# EAGLE board proto (EAGLE 4.13)
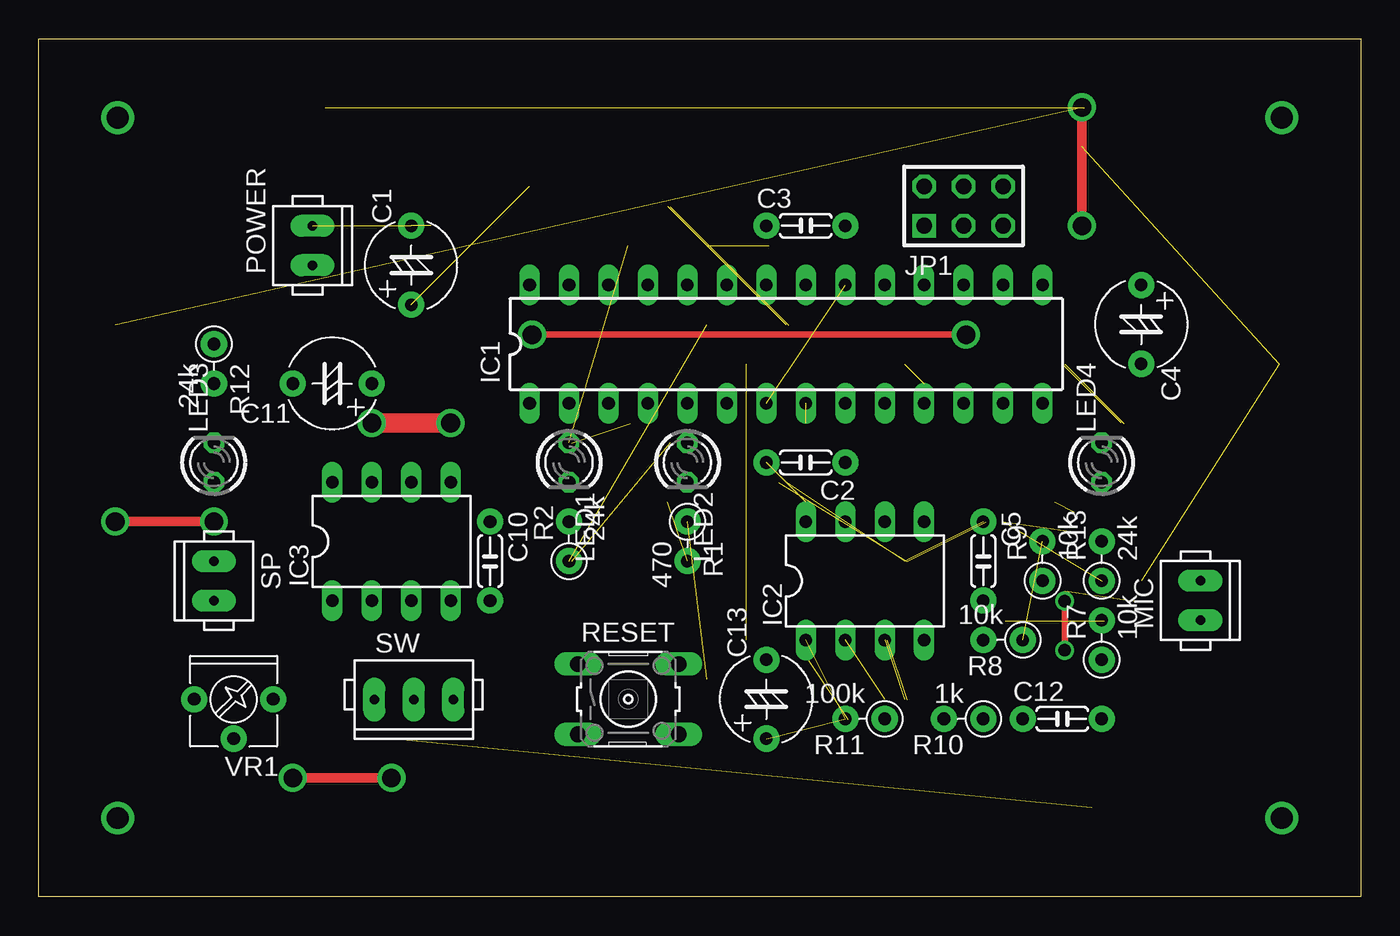
[diagram p0: board, top side]
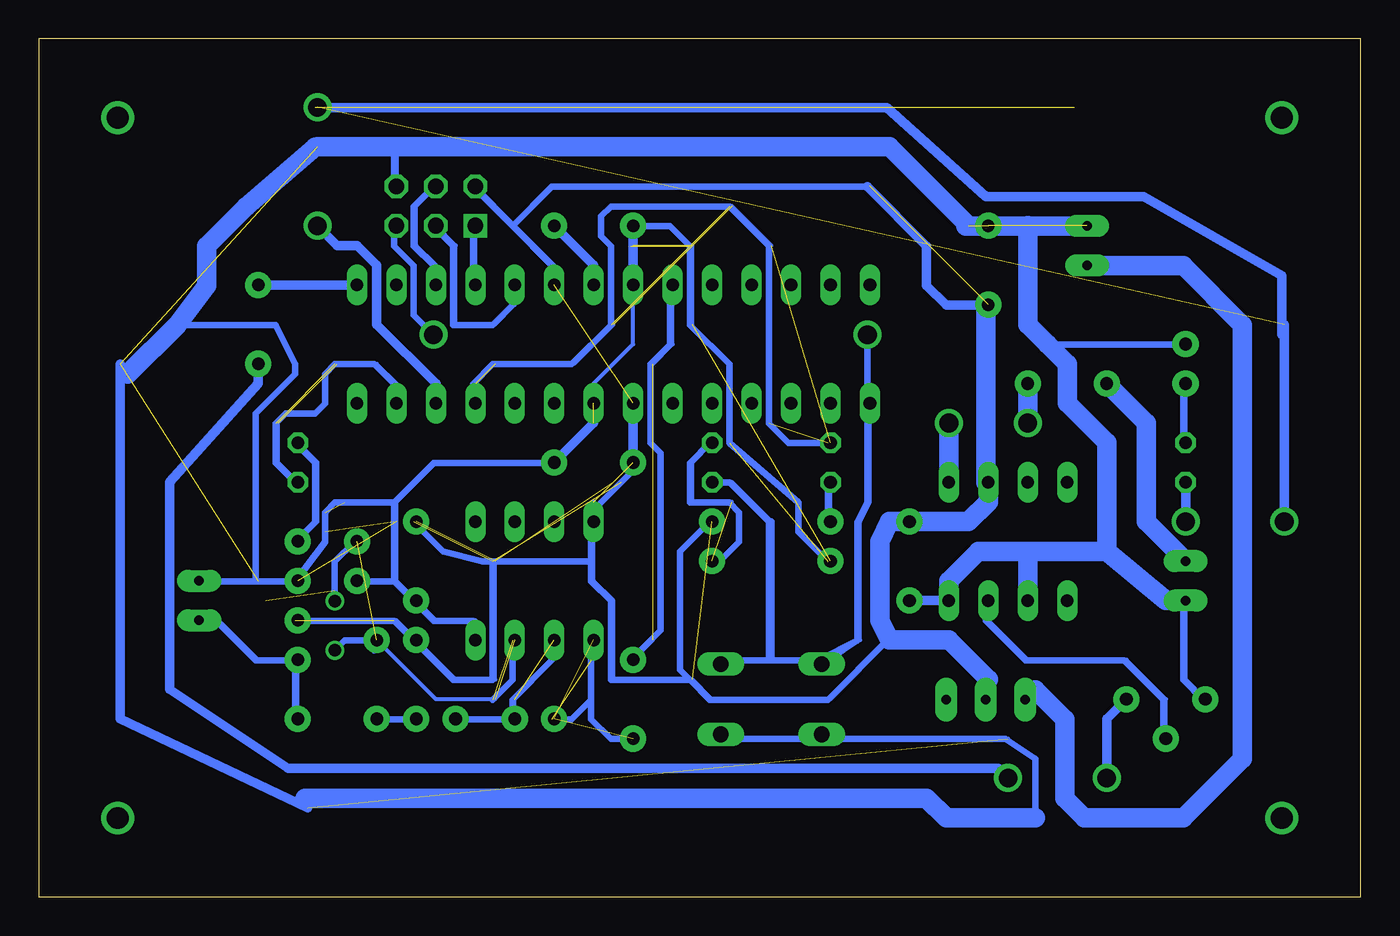
[diagram p1: board, bottom side, seen from below]

Size 85.09 x 55.24 mm. Coordinates in mm from the lower left corner, seen from the top.
Outline: 0,0 0,55.24 85.09,55.24 85.09,0 0,0
Copper layers (1*16): Top 0.035mm / dielectric 1.5mm / Bottom 0.035mm
Design rules "default": minimum track width 10mil, minimum drill 24mil, track to track 8mil, track to pad 8mil, pad to pad 8mil, via to via 8mil, smd to smd 8mil, copper to edge 40mil, drill to drill 8mil, minimum pad ring 10mil, minimum via ring 8mil, stop-mask expansion 4mil, vias tented up to drill 0mil, thermal gap 10mil

## Footprints (pad centres in the part's own frame; a part is rotated, then mirrored left to right if it is on the bottom)
E3,5-8 = drill 0.813 pad 1.676 round: 1 -2.54,0; 2 2.54,0
C5B3 = drill 0.813 pad 1.676 round: 1 -2.54,0; 2 2.54,0
DIL28-3 = drill 0.813 long: 1 -16.51,-3.81; 2 -13.97,-3.81; 3 -11.43,-3.81; 4 -8.89,-3.81; 5 -6.35,-3.81; 6 -3.81,-3.81; 7 -1.27,-3.81; 8 1.27,-3.81; 9 3.81,-3.81; 10 6.35,-3.81; 11 8.89,-3.81; 12 11.43,-3.81; 13 13.97,-3.81; 14 16.51,-3.81; 15 16.51,3.81; 16 13.97,3.81; 17 11.43,3.81; 18 8.89,3.81; 19 6.35,3.81; 20 3.81,3.81; 21 1.27,3.81; 22 -1.27,3.81; 23 -3.81,3.81; 24 -6.35,3.81; 25 -8.89,3.81; 26 -11.43,3.81; 27 -13.97,3.81; 28 -16.51,3.81
DIL08 = drill 0.813 long: 1 -3.81,-3.81; 2 -1.27,-3.81; 3 1.27,-3.81; 4 3.81,-3.81; 5 3.81,3.81; 6 1.27,3.81; 7 -1.27,3.81; 8 -3.81,3.81
AVR-ISP-6 = drill 1.016 square: 1 -2.54,-1.27 | drill 1.016 octagon: 2 -2.54,1.27; 3 0,-1.27; 4 0,1.27; 5 2.54,-1.27; 6 2.54,1.27
LED3MM = drill 0.813 octagon: A -1.27,0; K 1.27,0
2P-S = drill 0.61 pad 1.422 long: 1 -1.27,0; 2 1.27,0
0207/3V = drill 0.813 pad 1.676 round: 1 1.27,0; 2 -1.27,0
B3F-10XX = drill 1.016 long: 1 -3.251,2.261; 2 3.251,2.261; 3 -3.251,-2.261; 4 3.251,-2.261
3P-S = drill 0.61 pad 1.422 long: 1 -2.54,0; 2 0,0; 3 2.54,0
B25X = drill 0.813 pad 1.676 round: 1 -2.54,0; 2 2.54,0; 3 0,2.54

## Placement (x,y rotation side)
C1  [E3,5-8]  23.97,40.67 90 top
C2  0.1u  [C5B3]  49.37,27.97 180 top
C3  0.1u  [C5B3]  49.37,43.21 0 top
C4  [E3,5-8]  70.96,36.86 270 top
C5  0.1u  [C5B3]  60.8,21.62 270 top
C10  0.1u  [C5B3]  29.05,21.62 270 top
C11  [E3,5-8]  18.89,33.05 180 top
C12  0.1u  [C5B3]  65.88,11.46 0 top
C13  [E3,5-8]  46.83,12.73 90 top
IC1  MEGA8-P  [DIL28-3]  48.1,35.59 0 top
IC2  TL072P  [DIL08]  53.18,20.35 0 top
IC3  LM386  [DIL08]  22.7,22.89 0 top
JP1  AVR-ISP-6  [AVR-ISP-6]  59.53,44.48 0 top
LED1  [LED3MM]  34.13,27.97 270 top
LED2  [LED3MM]  41.75,27.97 270 top
LED3  [LED3MM]  11.27,27.97 90 top
LED4  [LED3MM]  68.42,27.97 90 top
MIC  [2P-S]  74.77,19.08 90 top
POWER  [2P-S]  17.62,41.94 90 top
R1  470  [0207/3V]  41.75,22.89 270 top
R2  24k  [0207/3V]  34.13,22.89 90 top
R7  10k  [0207/3V]  68.42,16.54 90 top
R8  10k  [0207/3V]  62.07,16.54 180 top
R9  10k  [0207/3V]  64.61,21.62 90 top
R10  1k  [0207/3V]  59.53,11.46 180 top
R11  100k  [0207/3V]  53.18,11.46 180 top
R12  24k  [0207/3V]  11.27,34.32 270 top
R13  24k  [0207/3V]  68.42,21.62 90 top
RESET  [B3F-10XX]  37.94,12.73 0 top
SP  [2P-S]  11.27,20.35 270 top
SW  [3P-S]  24.13,12.7 0 top
VR1  [B25X]  12.54,12.73 180 top

## Library data of the parts
C1-C5 C10-C13 R1 R2 R7-R13 VR1 = 1-cr
IC1 JP1 = atmel
IC2 IC3 = 1-LINEAR
LED1-LED4 = led
MIC POWER SP SW = 1-conn-jst
RESET = switch-omron

## Nets
GND: C1.2 C2.1 C3.1 C5.2 C10.2 IC1.8 IC1.22 IC2.4 IC3.2 IC3.4 JP1.6 MIC.2 POWER.2 R2.2 R9.2 R12.2 R13.2 RESET.3 RESET.4 SP.2 VR1.2
N$1: IC1.1 LED2.K RESET.1 RESET.2
N$3: C3.2 IC1.21
N$4: LED1.K R2.1
N$5: C4.1 IC1.15
N$6: C13.2 IC1.23
N$7: C4.2 VR1.1
N$8: IC1.11 LED1.A
N$9: IC1.19 JP1.3
N$10: IC1.18 JP1.1
N$11: IC1.17 JP1.4
N$12: IC3.3 VR1.3
N$13: C11.1 IC3.5
N$14: C11.2 SP.1
N$15: LED4.K R13.1
N$16: POWER.1
N$17: LED2.A R1.1
N$18: C12.2 MIC.1 R7.2
N$19: IC2.3 R8.2 R9.1
N$20: IC2.2 R10.1 R11.2
N$21: C12.1 R10.2
N$22: C13.1 IC2.1 R11.1
N$23: IC1.12 LED3.A
N$24: LED3.K R12.1
N$25: IC1.13 LED4.A
N$26: JP1.5
VCC: C1.1 C2.2 C5.1 C10.1 IC1.7 IC1.20 IC2.8 IC3.6 JP1.2 R1.2 R7.1 R8.1

## Tracks (layer width: path | path; a pad name or v marks a point on that pad's centre or on a via)
GND  (10 unrouted)
  Bottom 0.254: 43.02,36.86 43.02,41.94 | IC1.8 49.37,33.05 46.83,35.59 IC1.22 | IC2.4 56.99,17.81 59.53,17.81 C5.2 62.07,20.35 | R13.2 70.96,20.35 MIC.2 | RESET.4 40.48,10.19 35.4,10.19 RESET.3 34.13,10.19 22.7,10.19 | 62.07,48.29 JP1.6 | SP.2 11.27,14 VR1.2 | 20.16,35.59 R12.2 | 62.07,20.35 R9.2 | 62.07,20.35 62.07,24.16 62.07,25.43 59.53,27.97 C2.1
  Bottom 0.61: IC1.22 46.83,41.94 C3.1 | IC3.4 C10.2 | C2.1 49.37,30.51 | 67.78,5.75 79.85,11.46 79.85,34.32
  Bottom 1.27: 21.43,21.62 IC3.2 21.43,22.25 | IC3.4 26.51,20.35 24.61,22.25 21.43,22.25 | 21.43,43.21 21.43,36.86 20.16,35.59 18.89,34.32 18.89,31.78 16.35,29.24 16.35,22.25 | 16.35,22.25 12.54,19.08 SP.2 | 16.35,22.25 21.43,22.25 | 67.15,48.29 62.07,48.29 30.32,48.29 25.24,43.21
N$1
  Bottom 0.254: IC1.1 31.59,25.43 32.23,24.16 32.23,16.54 34.13,15.27 RESET.1 35.4,15.27 37.94,15.27 40.48,15.27 RESET.2 | LED2.K 40.48,26.7 37.94,24.16
  Bottom 0.406: 37.94,15.27 37.94,24.16
N$3
  Bottom 0.61: C3.2 49.37,40.67 IC1.21
N$4
  Bottom 0.254: R2.1 LED1.K
N$5
  Bottom 0.61: IC1.15 C4.1
N$6  (1 unrouted)
  Bottom 0.254: 45.56,34.32 44.29,35.59 IC1.23 | 45.56,16.54 C13.2
N$7  (via drill 1.2)
  Top 0.61: v16.35,7.65 v22.7,7.65
  Bottom 0.61: C4.2 70.96,33.05 76.67,26.7 76.67,13.37 69.06,8.29 23.34,8.29 v22.7,7.65 | v16.35,7.65 16.35,11.46 VR1.1
N$8  (3 unrouted)
  Bottom 0.254: 37.94,41.94 40.48,44.48 | 48.1,36.86 50.64,34.32 55.72,34.32 | 56.99,33.05 IC1.11
N$9
  Bottom 0.254: JP1.3 58.26,41.94 58.26,36.86 55.72,36.86 54.45,38.13 IC1.19
N$10
  Bottom 0.254: IC1.18 JP1.1
N$11
  Bottom 0.254: JP1.4 60.8,44.48 60.8,41.94 59.53,40.67 IC1.17
N$12
  Bottom 0.254: VR1.3 12.54,12.73 15.08,15.27 21.43,15.27 23.97,17.81 IC3.3
N$13  (via drill 1.2)
  Top 1.27: v26.51,30.51 v21.43,30.51
  Bottom 1.27: IC3.5 v26.51,30.51 | v21.43,30.51 C11.1
N$14
  Bottom 1.27: SP.1 13.81,24.16 13.81,30.51 C11.2
N$15
  Bottom 0.254: LED4.K 67.15,27.97 67.15,24.16 R13.1
N$17  (1 unrouted)
  Bottom 0.254: LED2.A 43.02,27.97 43.02,25.43 40.48,25.43
N$18
  Bottom 0.254: MIC.1 73.5,17.81 70.96,15.27 R7.2 C12.2
N$19  (2 unrouted)
  Bottom 0.254: 55.72,12.73 59.53,12.73 R8.2
N$20  (1 unrouted)
  Bottom 0.254: 54.45,12.73 R11.2 R10.1
N$21
  Bottom 0.254: R10.2 C12.1
N$22  (2 unrouted)
N$23  (via drill 1.2)  (2 unrouted)
  Top 0.61: v4.92,24.16 v11.27,24.16 | v67.15,50.83 v67.15,43.21
  Bottom 0.61: v11.27,24.16 LED3.A | v4.92,24.16 4.92,36.86 | v67.15,43.21 65.88,41.94 64.61,41.94 63.34,40.67 63.34,36.86 59.53,33.05 IC1.12 | 5.08,36.2 5.08,40.01 13.97,45.09 24.13,45.09 30.48,50.8 67.31,50.8
N$24
  Bottom 0.254: LED3.K R12.1
N$25  (1 unrouted)
  Bottom 0.254: 65.88,34.32 63.34,34.32 62.07,33.05 IC1.13 | 69.69,30.51 69.69,27.97 LED4.A
N$27  (via drill 1.2)
  Top 0.406: v31.75,36.2 v59.69,36.2
  Bottom 0.406: v31.75,36.2 31.75,25.4 32.38,24.13 32.38,16.51 34.92,15.24 38.1,15.24 | 41.91,26.67 40.64,26.67 38.1,24.13 38.1,15.24 | 38.1,15.24 41.27,15.24 | v59.69,36.2 60.96,37.47 60.96,40.64 62.23,41.91 62.23,43.18
N$28
  Bottom 0.406: 62.23,45.72 62.23,47.62
N$30
  Bottom 0.406: 31.75,45.72 52.07,45.72 54.61,43.18 | 57.15,45.72 54.61,43.18 | 54.61,43.18 52.07,40.64 52.07,39.37
  Bottom 0.61: 24.13,38.1 26.67,38.1 27.94,39.37 27.94,41.91 31.75,45.72
  Bottom 1.27: 24.13,26.67 24.13,38.1
N$31
  Bottom 1.27: 17.78,43.18 25.4,43.18
N$32
  Bottom 1.27: 17.78,40.64 11.43,40.64 7.62,36.83 7.62,8.89 11.43,5.08 17.78,5.08 19.05,6.35 19.05,11.43 20.95,13.34
N$33  (2 unrouted)
  Bottom 0.406: 76.2,36.83 69.85,36.83 68.58,34.29 68.58,33.66 71.12,31.11 71.12,20.32 | 71.12,20.32 68.58,20.32 66.67,22.86 66.67,23.5 66.67,24.77 66.04,25.4 65.41,25.4 62.23,25.4 | 71.12,20.32 74.93,20.32 | 52.07,27.94 59.69,27.94 62.23,25.4 | 62.23,25.4 62.23,20.32 | 64.77,20.32 62.23,20.32 | 62.23,20.32 59.69,17.78 57.15,17.78 57.15,16.51
  Bottom 1.27: 67.31,48.26 71.75,44.45 74.3,41.91 74.3,39.37 76.2,36.83 79.38,33.66
N$34  (1 unrouted)
  Bottom 0.406: 62.23,31.75 62.23,33.02 63.5,34.29 66.04,34.29 66.67,33.66 66.67,31.75 67.31,31.11 69.22,31.11 69.85,30.48 69.85,27.94 68.58,26.67
N$35
  Bottom 0.406: 68.58,29.21 67.31,27.94 67.31,24.13 68.58,22.86
N$36  (via drill 1.4)
  other vias: 5.08,50.16
N$37  (via drill 0.8)  (1 unrouted)
  Top 0.406: v66.04,15.88 v66.04,19.05
  Bottom 0.406: 64.77,22.86 66.04,21.59 66.04,19.68 v66.04,19.05 | 63.5,15.88 63.5,16.51 65.41,16.51 v66.04,15.88
N$38
  Bottom 0.406: 74.93,17.78 73.66,17.78 71.12,15.24 68.58,15.24 68.58,11.43
N$39
  Bottom 0.406: 60.96,11.43 63.5,11.43
N$40
  Bottom 0.406: 58.42,11.43 54.61,11.43 54.61,12.7 52.07,15.24 52.07,16.51
N$42  (3 unrouted)
  Bottom 0.406: 55.88,21.59 55.88,13.97 58.42,13.97 62.23,17.78 68.58,17.78 | 46.99,27.3 47.62,26.67 48.9,25.4 | 60.96,24.13 59.05,22.23 56.52,21.59 55.88,21.59 | 41.91,24.13 43.81,22.23 43.81,14.61 43.18,13.97 | 43.18,13.97 41.91,12.7 34.29,12.7 30.48,16.51 | 49.53,21.59 49.53,24.13 | 49.53,21.59 49.53,20.32 48.26,19.05 48.26,13.97 43.18,13.97 | 49.53,21.59 55.88,21.59
N$43  (1 unrouted)
  Bottom 0.406: 49.53,16.51 49.53,15.24 49.53,12.7 | 49.53,12.7 50.8,11.43 52.07,11.43 | 49.53,12.7 49.53,11.43 48.26,10.16 46.99,10.16
N$44
  Bottom 0.406: 41.27,10.79 41.27,10.16 22.86,10.16 20.95,8.89 20.95,5.08 21.59,5.08
  Bottom 1.27: 20.95,5.08 26.67,5.08 27.94,6.35 67.94,6.35
N$45
  Bottom 0.406: 10.16,12.7 11.43,13.97 11.43,19.05
N$46
  Bottom 0.406: 12.7,10.16 12.7,12.7 15.24,15.24 21.59,15.24 24.13,17.78 24.13,19.05
N$47
  Bottom 0.406: 11.43,33.02 11.43,29.21
N$48
  Bottom 0.406: 11.43,35.56 19.68,35.56
N$49  (2 unrouted)
  Bottom 0.406: 57.15,31.75 57.15,33.02 55.88,34.29 50.8,34.29 48.26,36.83 48.26,41.91 48.9,42.55 48.9,43.81 48.26,44.45 40.64,44.45 38.1,41.91 38.1,30.48 36.83,29.21 33.66,29.21
N$50
  Bottom 0.406: 59.69,45.72 60.96,44.45 60.96,41.91 59.69,40.64 59.69,39.37
N$51
  Bottom 0.406: 44.45,38.73 44.45,35.56 45.72,34.29 45.72,29.21 45.09,28.57 45.09,17.14 46.99,15.24
N$52  (2 unrouted)
  Bottom 0.406: 34.29,21.59 36.2,23.5 36.2,25.4 40.64,29.21 40.64,34.29 43.18,36.83 43.18,41.91 44.45,43.18 46.99,43.18
N$53
  Bottom 0.406: 34.29,26.67 34.29,24.13
N$54
  Bottom 0.406: 41.91,29.21 43.18,27.94 43.18,25.4 40.64,25.4 40.01,24.77 40.01,22.86 41.27,21.59 41.91,21.59
N$55  (via drill 1.4)
  other vias: 80.01,50.16
N$56  (via drill 1.4)
  other vias: 80.01,5.08
N$57
  Bottom 0.406: 57.15,43.18 57.15,39.37
N$58
  Bottom 0.406: 59.69,43.18 58.42,41.91 58.42,36.83 55.88,36.83 54.61,38.1 54.61,39.37
N$59  (via drill 1.4)
  other vias: 5.08,5.08
N$60  (1 unrouted)
N$61
  Bottom 0.406: 54.61,16.51 54.61,13.97 55.88,12.7
VCC  (7 unrouted)
  Bottom 0.254: R7.1 62.07,17.81 R8.1 58.26,14 55.72,14 55.72,21.62 | 49.37,25.43 IC2.8 49.37,20.35 48.1,19.08 48.1,14 43.02,14 41.75,12.73 34.13,12.73 30.32,16.54 | 54.45,43.21 JP1.2 | 54.45,43.21 51.91,40.67 IC1.20 | 54.45,43.21 51.91,45.75 31.59,45.75
  Bottom 0.61: C2.2 IC1.7 | 25.24,24.16 27.78,24.16
  Bottom 1.27: 23.97,14 26.51,16.54 30.32,16.54 30.95,17.81 30.95,22.89 30.32,24.16 C10.1 25.24,24.16 23.97,25.43 IC3.6